# Altium PCB Knapper og leds.PcbDoc
Units mil, origin at the board's own origin, x right, y up, seen from the top; angles counter-clockwise.
Board outline 2000 x 1900 mil, 2 copper layers (Top Layer, Bottom Layer); 25 components, 19 nets, 76 pads, 24 vias.
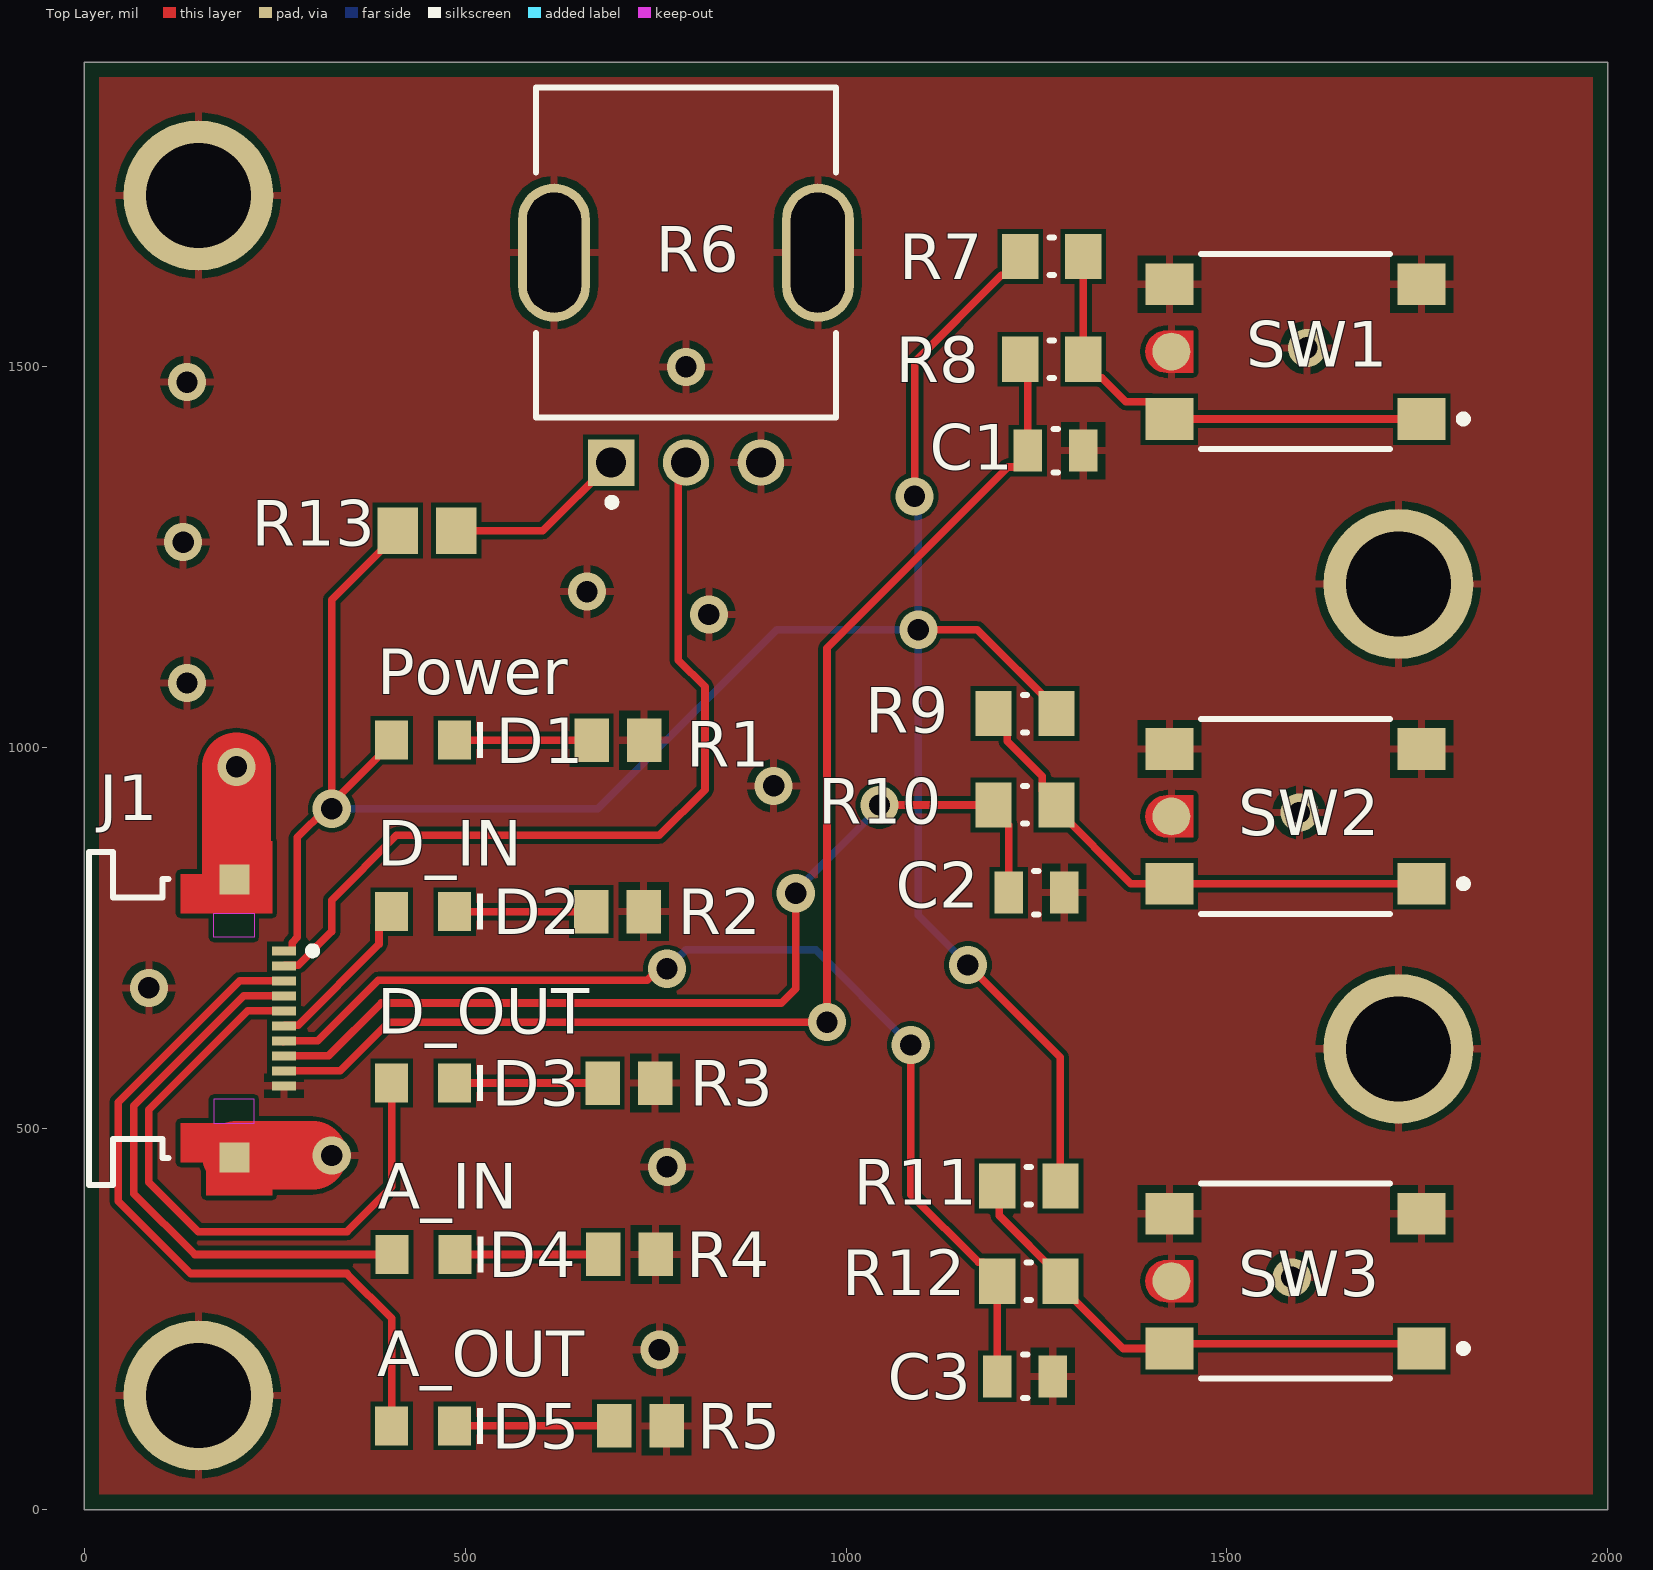
[diagram p0: Top Layer view]
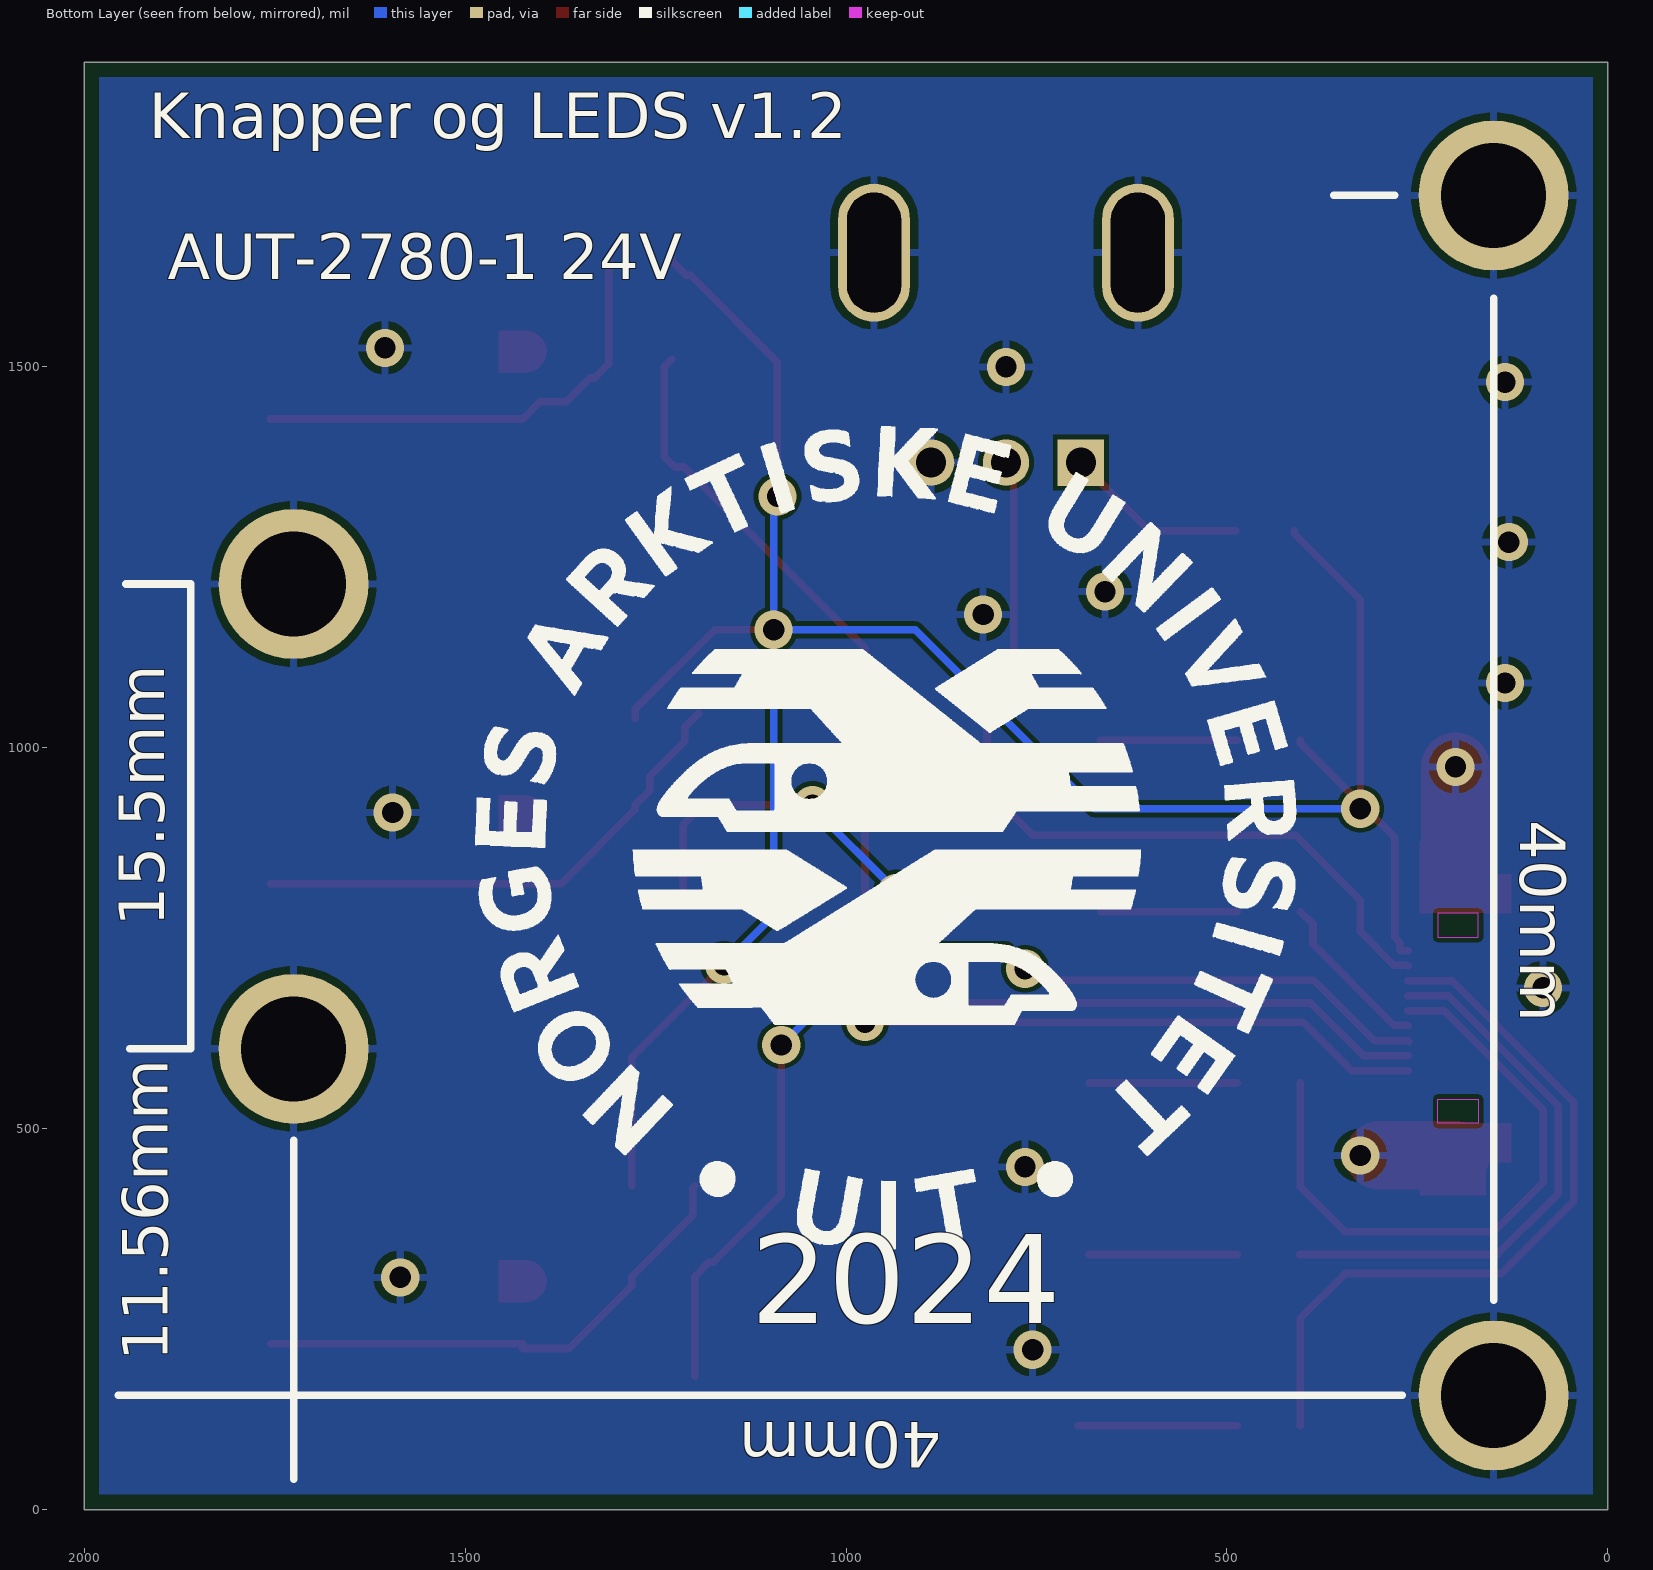
[diagram p1: Bottom Layer view, seen from below]
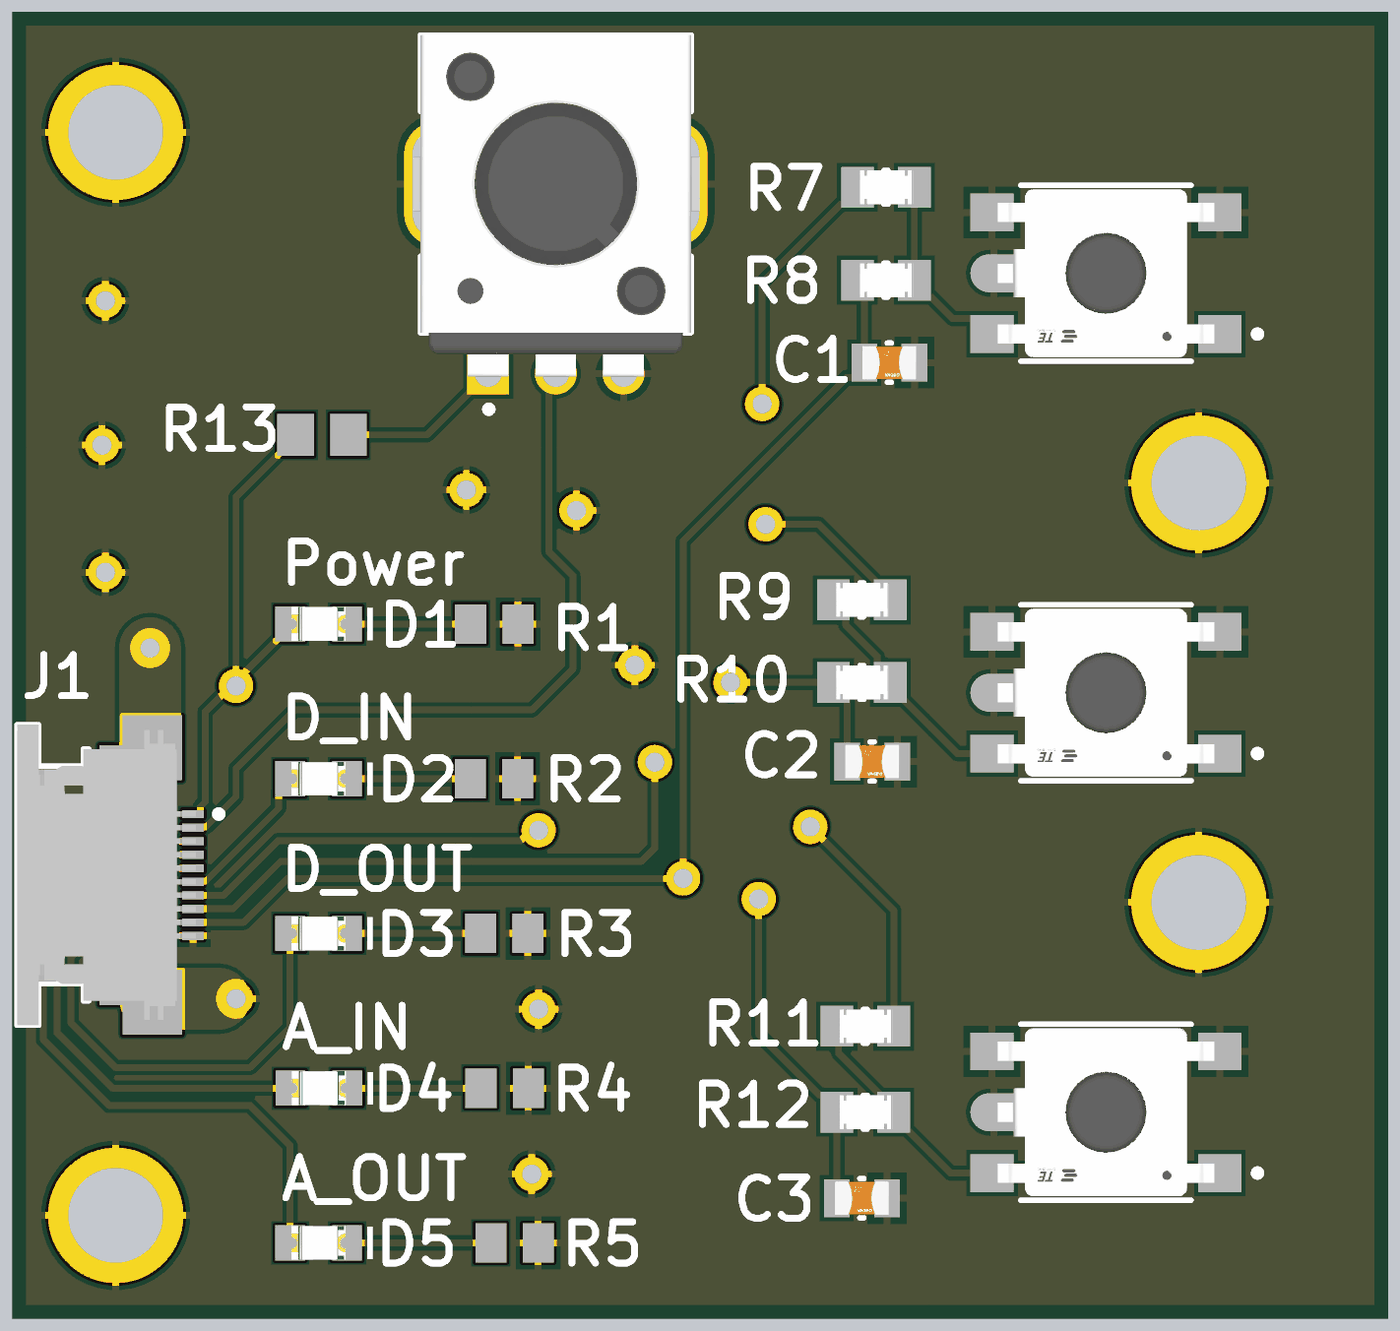
[diagram p2: 3D render of the assembled board from above, using the file's embedded part models]

## Layer stack, top to bottom
Top Solder: solder mask 0.4, Solder Resist, Dk 3.5
Top Layer: signal copper 1.4
Dielectric 1: dielectric 12.6, FR-4, Dk 4.8
Bottom Layer: signal copper 1.4
Bottom Solder: solder mask 0.4, Solder Resist, Dk 3.5

## Board outline
0,0 2000,0 2000,1900 0,1900

## Design rules (kind name [scope] priority, off if disabled: settings)
Clearance [All] p1: gap=6 ignorepadtopadclearanceinfootprint=FALSE
PolygonConnect [All] p1: connectstyle=Relief reliefconductorwidth=10 reliefentries=4 polygonreliefangle="90 Angle" airgapwidth=10
RoutingVias [All] p1: holewidth=28 width=50 viastyle="Through Hole" minholewidth=28 minwidth=50 maxholewidth=28 maxwidth=50
SolderMaskExpansion [All] p1: expansion=4 istentingtop=FALSE
Width [All] p1: maxlimit=10 minlimit=10 preferedwidth=10
30 further rules are at their usual default settings.

## Components (designator, comment, footprint, x,y, rotation, side; value= is the part's Value field where it differs from the comment)
C1 "CC0805KRX7R7BB104" FP-CC0805-0_85-MFG 1275,1390 r0 top value="100 nF"
C2 "CC0805KRX7R7BB104" FP-CC0805-0_85-MFG 1250,810 r0 top value="100 nF"
C3 "CC0805KRX7R7BB104" FP-CC0805-0_85-MFG 1235,175 r0 top value="100 nF"
D1 "150080SS75000" WL-SMCW_0805_150080xx75000 445,1010 r180 top
D2 "150080VS75000" WL-SMCW_0805_150080xx75000 445,785 r180 top
D3 "150080VS75000" WL-SMCW_0805_150080xx75000 445,560 r180 top
D4 "150080VS75000" WL-SMCW_0805_150080xx75000 445.55,335 r180 top
D5 "150080VS75000" WL-SMCW_0805_150080xx75000 445,110 r180 top
J1 "52746-1071" MOLX-52746-1071 230,645 r270 top
R1 "ERJ6ENF56R0V" RESC2013X70X40NL20T20 700.55,1010 r0 top
R2 "ERJ6ENF56R0V" RESC2013X70X40NL20T20 700,785 r0 top
R3 "ERJ6ENF56R0V" RESC2013X70X40NL20T20 715,560 r0 top
R4 "ERJ6ENF56R0V" RESC2013X70X40NL20T20 715.55,335 r0 top
R5 "ERJ6ENF56R0V" RESC2013X70X40NL20T20 730,110 r0 top
R6 "PTV09A-4225F-B103" FP-PTV09A-4-MFG 790,1650 r0 top
R7 "CRCW080510K0FKEA" FP-CRCW0805-e3-IPC_A 1270,1645 r0 top
R8 "CRCW080510K0FKEA" FP-CRCW0805-e3-IPC_A 1270,1510 r180 top
R9 "CRCW080510K0FKEA" FP-CRCW0805-e3-IPC_A 1235,1045 r180 top
R10 "CRCW080510K0FKEA" FP-CRCW0805-e3-IPC_A 1235,925 r180 top
R11 "CRCW080510K0FKEA" FP-CRCW0805-e3-IPC_A 1240,425 r180 top
R12 "CRCW080510K0FKEA" FP-CRCW0805-e3-IPC_A 1240,300 r180 top
R13 "ERJ6ENF3301V" RESC2013X70X40ML20T20 450,1285 r180 top
SW1 "FSM1LP" FP-FSM1LP-MFG 1590,1520 r180 top
SW2 "FSM1LP" FP-FSM1LP-MFG 1590,910 r180 top
SW3 "FSM1LP" FP-FSM1LP-MFG 1590,300 r180 top

## Footprints (in the part's own frame and the unit in brackets; to place one, negate y for a bottom-side part, rotate by r counter-clockwise, add the part's x,y. Pads: shape width x height; smd on the part's side, far side on the other; paste and mask are expansions set on the pad)
FP-CC0805-0_85-MFG [mm]
  rect 0.95x1.4 smd paste+0 mask+0: 1(-0.925,0) 2(0.925,0)
  silkscreen extent -0.08,-0.72 0.08,0.72, body extent -1.6,-1.05 1.6,1.05, height 0.25
FP-CRCW0805-e3-IPC_A [mil]
  rect 47.5x59.38 smd paste+0 mask+0: 1(-41.37,0) 2(41.37,0)
  silkscreen extent -3,-25 3,25, body extent -85,-49 85,49, height 10
FP-FSM1LP-MFG [mm]
  rect 1.6x1.395 smd paste+0 mask+0: 1(-4.205,2.248) 2(4.205,2.248) 3(-4.205,-2.248) 4(4.205,-2.248)
  round 1.26 smd paste+0 mask+0: 5(4.139,0)
  Top Layer region: 3.405,0.7 4.307,0.7 4.574,0.647 4.801,0.496 4.952,0.269 5.005,0.002 5.005,0.002 5.005,-0.002 4.952,-0.269 4.801,-0.496 4.574,-0.647 4.307,-0.7 4.307,-0.7 3.405,-0.7
  silkscreen extent -5.72,-3.25 3.15,3.25, body extent -5.1,-3.35 5.11,3.35, height 0.25
FP-PTV09A-4-MFG [mm]
  rect 1.55x1.55 hole 1 paste-2539.97 mask+0: 1(-2.5,-7)
  round 1.55 hole 1 paste-2539.97 mask+0: 2(0,-7) 3(2.5,-7)
  rrect100% 2.4x4.6 hole 4 slot 1.8 at 0 deg paste-2539.97 mask+0: 4(-4.4,0) 5(4.4,0)
  silkscreen extent -5,-8.45 5,5.5, body extent -5.8,-7.88 5.8,5.6, height 0.25
MOLX-52746-1071 [mm] "FPC Connector, 10-Leads, Right Angle, Pitch 0.5 mm, Mated Height 2.0 mm, SMT"
  rect 0.3x0.8 smd: 1(-2.25,0.824) 2(-1.75,0.824) 3(-1.25,0.824) 4(-0.75,0.824) 5(-0.25,0.824) 6(0.25,0.824) 7(0.75,0.824) 8(1.25,0.824) 9(1.75,0.824) 10(2.25,0.824)
  rect 1x1 smd: MP1(-4.634,-0.824) MP2(4.635,-0.824)
  Top Layer region: -5.9,0.424 -3.5,0.424 -3.5,-2.626 -3.5,-2.626 -4.8,-2.626 -4.8,-1.777 -4.8,-1.776 -5.9,-1.776
  Top Layer region: 3.5,0.424 5.9,0.424 5.9,-1.776 5.9,-1.777 4.8,-1.777 4.8,-2.626 3.5,-2.626 3.5,0.424
  Keep-Out Layer region: -3.5,-0.176 -2.7,-0.176 -2.7,-1.516 -3.5,-1.516
  Keep-Out Layer region: 3.5,-0.176 2.7,-0.176 2.7,-1.516 3.5,-1.516
  silkscreen extent -5.55,-5.68 5.55,1.9, body extent -5.55,-5.68 5.55,0.92, height 2.01
RESC2013X70X40ML20T20 [mm] "Chip Resistor, 2-Leads, Body 2.00x1.25mm, IPC Low Density"
  rect 1.35x1.55 smd: 1(-0.975,0) 2(0.975,0)
  body extent -1.1,-0.72 1.1,0.72, height 0.7
RESC2013X70X40NL20T20 [mm] "Chip Resistor, 2-Leads, Body 2.00x1.25mm, IPC Medium Density"
  rect 1.15x1.45 smd: 1(-0.875,0) 2(0.875,0)
  body extent -1.1,-0.72 1.1,0.72, height 0.7
WL-SMCW_0805_150080xx75000 [mm] "SMD Mono-color Chip LED, body 2.0x1.25mm"
  rect 1.1x1.3 smd: 1(-1.05,0) 2(1.05,0)
  silkscreen extent -2,-0.6 -1.8,0.6, body extent -1,-0.63 1,0.62, height 0.7

## Part data
C1 C2 C3: library part CMP-1036-04402-6, "CAP CER 0.1UF 16V X7R 0805", Capacitance="100 nF", Manufacturer=Yageo, Package=CC0805-0.85, Temperature="-30°C to +85°C", Temperature Characteristic=X7R, Temperature Range High=+85°C, Temperature Range Low=-30°C, Tolerance=0.1, Voltage Rating="16 V", Automotive=No, Category=Cap, ComponentLink2Description=Datasheet, ComponentLink2URL=http://www.yageo.com/documents/recent/UPY-GPHC_Y5V_6.3V-to-50V_8.pdf, Device Class L1="Passive Components", Device Class L2=Capacitors, Device Class L3="Ceramic Capacitors", Digikey Description="CAP CER 0.1UF 16V X7R 0805", Footprint Url=http://www.yageo.com/exep/pages/download/literatures/UPY-C_GEN_24.pdf, Height=0.95mm, Ipc Land Pattern Name=CAPC200125X85, Lead Free=Yes, Manufacturer Part Number=CC0805KRX7R7BB104, Material=Ceramic, Mouser Description="Multilayer Ceramic Capacitors MLCC - SMD/SMT 100nF 16V X7R 10%", Octopart=https://octopart.com/cc0805krx7r7bb104-yageo-39467769, RoHS=TRUE
D1: library part CMP-1426-00010-3, Case Code (Imperial)=0805, Case Code (Metric)=2012, Color=Red, Forward Current=100mA, Forward Voltage=1.9V, Max Junction Temperature (Tj)=95°C, Max Operating Temperature=85°C, Max Reverse Voltage (DC)=5V, Min Operating Temperature=-40°C, Power Dissipation=72mW, Test Current=20mA, Case/Package=0805, Dominant Wavelength=630nm, Height=700µm, Length=2mm, Lens Style="Clear, Rectangular", Luminous Intensity=60mcd, Mount="Surface Mount", NexarPartId=29717782, Packaging="Tape and Reel", Peak Wavelength=645nm, REACH SVHC=Unknown, Reverse Voltage=5V, RoHS=Compliant, Viewing Angle=140°, Wavelength=630nm, Width=1.25mm
D2 D3 D4 D5: library part CMP-1426-00009-5, Case Code (Imperial)=0805, Case Code (Metric)=2012, Color=Green, Forward Current=100mA, Forward Voltage=2V, Max Junction Temperature (Tj)=95°C, Max Operating Temperature=85°C, Max Reverse Voltage (DC)=5V, Min Operating Temperature=-40°C, Power Dissipation=72mW, Test Current=20mA, Case/Package=0805, Dominant Wavelength=570nm, Height=700µm, Length=2mm, Lens Style="Clear, Rectangular", Luminous Intensity=40mcd, Mount="Surface Mount", NexarPartId=29717783, Packaging="Tape and Reel", Peak Wavelength=572nm, REACH SVHC=Unknown, Reverse Voltage=5V, RoHS=Compliant, Viewing Angle=140°, Wavelength=570nm, Width=1.25mm
J1: library part CMP-1241-00372-1, "0.5 mm Pitch Easy-On(TM) Type FPC Connector, 2.0 mm Mated Height, Right Angle, ZIF, SMT, Bottom Contact, 10 Circuits, -20 to 85 degC, ELV and RoHS Compliant, Tape and Reel", Current (Max per Contact)=0.5A, Manufacturer=Molex, Voltage (Max)=50V, Circuits (Loaded)=10, ComponentLink1Description="Manufacturer URL", ComponentLink1URL=http://www.molex.com/molex/index.jsp, ComponentLink2Description=Datasheet, ComponentLink2URL=http://www.molex.com/webdocs/datasheets/pdf/en-us/0527461071_FFC_FPC_CONNECTORS.pdf, ComponentLink3Description="Package Specification", ComponentLink3URL=http://www.molex.com/pdm_docs/sd/527461071_sd.pdf, Contact Position=Bottom, Durability (mating cycles max)=20, Entry Angle="90degrees Angle", Mated Height=2.00mm, Material - Metal="Phosphor Bronze", Material - Plating Mating=Gold, Material - Plating Termination=Gold, Mounting Technology="Surface Mount", Number of Rows=1, Orientation="Right Angle", PackageDescription="10-Lead FPC Connector, Pitch 0.5 mm", PackageReference=52746-1071, PackageVersion="Rev. H, 05/2009", Packing="Tape and Reel", PartNumber=52746-1071, PCB Locator=No, PCB Retention=Yes, Pitch - Mating Interface=0.50mm, Polarized to PCB=Yes, RoHS=TRUE, Stackable=No
R1 R2 R3 R4 R5: library part CMP-2001-00560-1, Manufacturer=Panasonic, Part Number=ERJ6ENF56R0V
R6: library part CMP-07234-000052-1, "POT 10K OHM 1/20W CARBON LINEAR", Max Operating Temperature=50°C, Max Power Dissipation=50mW, Min Operating Temperature=-10°C, Package Quantity=100, Resistance=10kR, Resistance Tolerance=20%, Resistor Type=Carbon, Actuator Diameter=0.236inch, Actuator Length=0.984inch, Depth=12.5mm, Height=12.5mm, Hole Diameter=9.1mm, Length=11.4mm, Military Standard=Not, Mount="Through Hole", Number of Gangs=1, Number of Turns=1, Packaging=Bulk, Power Rating=50mW, Radiation Hardening=No, REACH SVHC="No SVHC", RoHS Compliant=Yes, Series="Pro Audio PTV09", Taper=Linear, Technology="CARBON FILM", Termination=PCB, Tolerance=20%, Type=Potentiometer
R7 R8 R9 R10 R11 R12: library part CMP-2001-04908-2, "RES Thick Film, 10kΩ, 1%, 0.125W, 100ppm/°C, 0805", Case Code (Imperial)=0805, Case Code (Metric)=2012, Max Operating Temperature=155°C, Min Operating Temperature=-55°C, Package Quantity=5000, Power Rating=125mW, Resistance=10kR, Temperature Coefficient=100ppm/°C, Tolerance=1%, Voltage Rating=150V, Case/Package=0805, Composition="Thick Film", Contact Plating=Tin, Depth=1.25mm, Height=0.45mm, Lead Free="Lead Free", Length=2mm, Military Standard=Not, Packaging="Tape and Reel", Radiation Hardening=No, Termination=SMD/SMT, Voltage Rating (DC)=150V, Weight=0.000194oz, Width=1.25mm
R13: library part CMP-2001-00533-1, Manufacturer=Panasonic, Part Number=ERJ6ENF3301V
SW1 SW2 SW3: library part CMP-03402-000015-1, "SWITCH TACTILE SPST-NO 0.05A 24V", Actuator Color=Black, Contact Current Rating=50mA, Contact Resistance=100mR, Max Operating Temperature=85°C, Max Voltage Rating (DC)=12V, Min Operating Temperature=-35°C, Operating Force=1.57N, Package Quantity=2000, Actuator Length=0.01inch, Actuator Material=Polyphthalamide, Actuator Type=Standard, Contact Material="Copper Alloy", Contact Plating=Silver, Current Rating=50mA, Depth=8mm, Electrical Life=100000Cycles, ELV=Compliant, Illumination Type=Non-Illuminated, Lead Free="Lead Free", Length=6.19mm, Max Current Rating=50mA, Mechanical Life=100000Cycles, Mount="Surface Mount", Orientation=Straight, Packaging="Loose Piece", REACH SVHC="No SVHC", RoHS Compliant=Yes, Series=FSM1LP, Switch Function=Off-Mom, Switch Travel=0.25mm, Termination="Gull Wing", Throw Configuration=SPST, Type=Switch, Voltage Rating (DC)=12V

## Free pads (board coordinates)
  round 196.85 hole 137.8: 6(150,1725) 7(1725,605) 8(1725,1215) 9(150,150)

## Via types
v1: diameter 50, hole 28, Top Layer to Bottom Layer, 24 vias

## Nets (pads, with @x,y where several pads share a name; then routed paths per layer and width w, separated by ;. In a path a pad name is that pad's centre, name@x,y a point inside that pad or via, vN(x,y) a via of type N, cw(c..) or ccw(c..) an arc to the next point about the centre after c; other vN are vias at no path point)
GND: C1.2 C2.2 C3.2 J1.10 J1.MP1 J1.MP2 pad.6 pad.7 pad.8 pad.9 R1.2 R2.2 R3.2 R4.2 R5.2 R6.3 R6.4 R6.5 SW1.3 SW1.4 SW1.5 SW2.3 SW2.4 SW2.5 SW3.3 SW3.4 SW3.5 | length 252
  Top Layer w10: J1.MP2 J1.MP2@200.04,465 ; J1.MP1 J1.MP1@200,829.88
  Top Layer w90: J1.MP1@200,829.88 v1(200,975) ; J1.MP2@200.04,465 v1@300,465
  other v1: 755,210 1585,305 765,450 325,465 85,685 1595,915 905,950 135,1085 820,1175 660,1205 130,1270 135,1480 790,1500 1605,1525
LED0: D2.2 J1.6 | length 218.6
  Top Layer w10: J1.6 263.33,636.06 280.85,636.06 387.01,742.22 387.01,768.35 D2.2
LED1: D3.2 J1.5 | length 832.4
  Top Layer w10: J1.5 214.84,654.84 85,525 85,430 150,365 345,365 403.66,423.66 D3.2
LED2: D4.2 J1.4 | length 744.6
  Top Layer w10: J1.4 209.53,674.53 65,530 65,415 145,335 D4.2
LED3: D5.2 J1.3 | length 977
  Top Layer w10: J1.3 204.21,694.21 45,535 45,405 140,310 345,310 403.66,251.34 D5.2
NetD1_1: D1.1 R1.1 | length 179.8
  Top Layer w10: D1.1 R1.1
NetD2_1: D2.1 R2.1 | length 179.2
  Top Layer w10: D2.1 R2.1
NetD3_1: D3.1 R3.1 | length 194.2
  Top Layer w10: D3.1 R3.1
NetD4_1: D4.1 R4.1 | length 194.2
  Top Layer w10: D4.1 R4.1
NetD5_1: D5.1 R5.1 | length 209.2
  Top Layer w10: D5.1 R5.1
NetR6_1: R6.1 R13.1 | length 240.2
  Top Layer w10: R13.1 602.17,1285 R6.1
NetR7_2: R7.2 R8.1 SW1.1 SW1.2 | length 615.2
  Top Layer w10: R7.2 R8.1 1311.37,1504.06 1330.12,1485.31 1336.06,1485.31 1367.4,1453.98 1401.99,1453.98 SW1.2 SW1.1
NetR9_2: R9.2 R10.1 SW2.1 SW2.2 | length 679.8
  Top Layer w10: R9.2 1211.64,1026.99 1211.64,1008.36 1257.62,962.38 1257.62,943.75 R10.1 1276.37,919.06 1373.92,821.52 SW2.2 SW2.1
NetR11_2: R11.2 R12.1 SW3.1 SW3.2 | length 673
  Top Layer w10: R11.2 1201.14,422.48 1201.14,386.17 1281.37,305.94 R12.1 1281.37,294.06 1363.92,211.52 SW3.2 ; SW3.2@1424.45,218.03 SW3.1@1755,218.03
Potmeter: J1.2 R6.2 | length 1096.8
  Top Layer w10: J1.2 263.33,714.8 280.85,714.8 325,758.95 325,800 410,885 755,885 815,945 815,1080 780,1115 R6.2@780,1355
POWER_LED: D1.2 J1.1 R7.1 R9.1 R11.1 R13.2 | length 3202.4
  Top Layer w10: J1.1 272.26,733.58 273.17,734.49 273.17,744.33 280,751.16 280,882.4 317.6,920 v1(325,920) v1@325,927.4 ; D1.2 403.66,1006.06 v1@325,927.4 ; R13.2 411.61,1281.06 325,1194.45 v1@325,927.4 ; v1(1090,1330) 1090,1506.37 1203.94,1620.31 1209.88,1620.31 1228.63,1639.06 R7.1 ; v1(1095,1155) 1172.31,1155 1276.37,1050.94 R9.1 R9.1@1276.37,1039.06 ; v1(1160,715) 1281.37,593.63 R11.1
  Bottom Layer w10: v1(325,920) 674.16,920 909.16,1155 v1(1095,1155) ; v1(1090,1330) 1095,1325 v1(1095,1155) ; v1(1160,715) 1095,780 v1(1095,1155)
SW1: C1.1 J1.9 R8.2 | length 1729.5
  Top Layer w10: J1.9 336.1,576.1 400,640 v1(975,640) 975,1130.91 1212.6,1368.51 1224.88,1368.51 1238.58,1382.21 1238.58,1500.05 R8.2
SW2: C2.1 J1.8 R10.2 | length 1267.6
  Top Layer w10: J1.8 320.79,595.79 390,665 915,665 934,684 v1(934,809.08) ; v1(1044,925) R10.2 1193.63,919.06 1213.58,899.11 C2.1
  Bottom Layer w10: v1(934,809.08) 934,812.04 1044,922.04 v1(1044,925)
SW3: C3.1 J1.7 R12.2 | length 1403.6
  Top Layer w10: J1.7@261.52,614.57 J1.7 306.54,615.47 386.06,695 739.18,695 754.18,710 v1(765,710) ; v1(1085,610) 1085,413.63 1173.94,324.69 1179.88,324.69 1198.63,305.94 C3.1 C3.1
  Bottom Layer w10: v1(765,710) 790,735 960,735 v1@1080,615

## Polygon pours and split planes (outlines as drawn)
GND on Bottom Layer "GND_L02_P002" (solid, remove dead copper, pour order 2): 20,20 1980,20 1980,1880 20,1880
GND on Top Layer "GND_L01_P000" (solid, remove dead copper, pour order 0): 20,20 1980,20 1980,1880 20,1880

## Silkscreen, mask and mechanical layers (free items; w line width, h text height)
Top Overlay:
  text "Power" at 385,1070 h60
  text "D_IN" at 385,845 h60
  text "D_OUT" at 385,625 h60
  text "A_IN" at 385.55,395 h60
  text "A_OUT" at 385,175 h60
Bottom Overlay:
  drawing of 42 lines, arcs and shapes, not listed
  text "Knapper og LEDS v1.2" at 1915,1799.99 h60
  text "AUT-2780-1 24V" at 1890,1615 h60
  text "40mm" at 115,905 h60 r90
  text "15.5mm" at 1895,765 h60 r270
  text "2024" at 1125,206.67 h200
  text "11.56mm" at 1890,195 h60 r270
  text "40mm" at 875,115 h60 r180
Bottom 3D Body:
  text "AUT-2780-1 24V" at 1775,1470 h60